# Altium PCB esp_sd_debug_adapter.PcbDoc
Units mm, origin at the board's own origin, x right, y up, seen from the top; angles counter-clockwise.
Board outline 11 x 27.5 mm, 2 copper layers (Top Layer, Bottom Layer), stack 0.773 mm thick; 3 components, 8 nets, 20 pads, 10 vias.
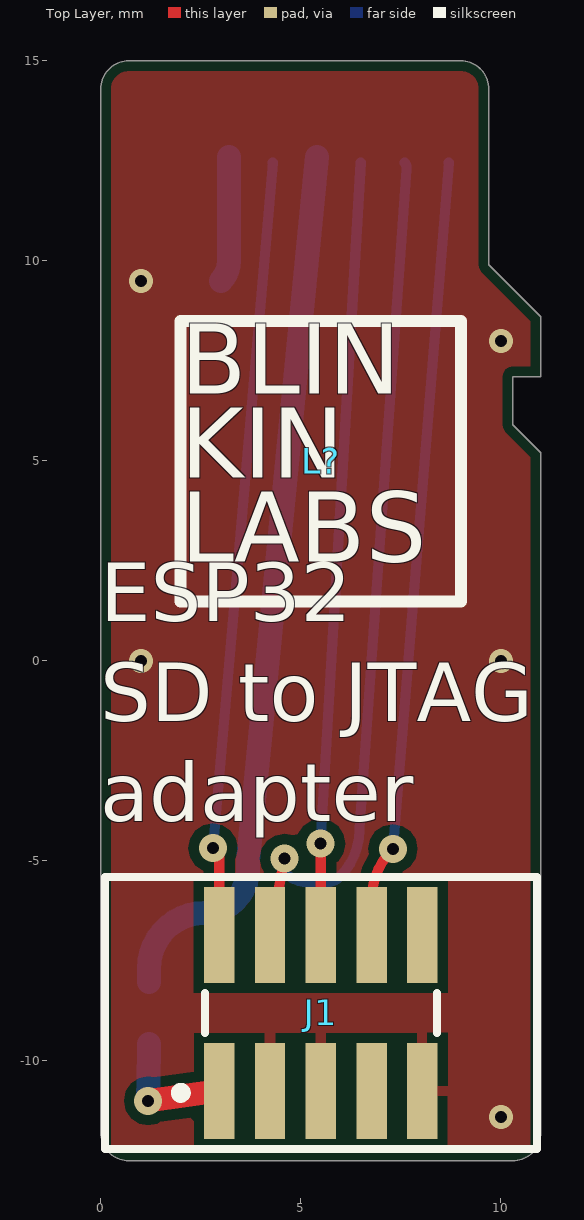
[diagram p0: Top Layer view]
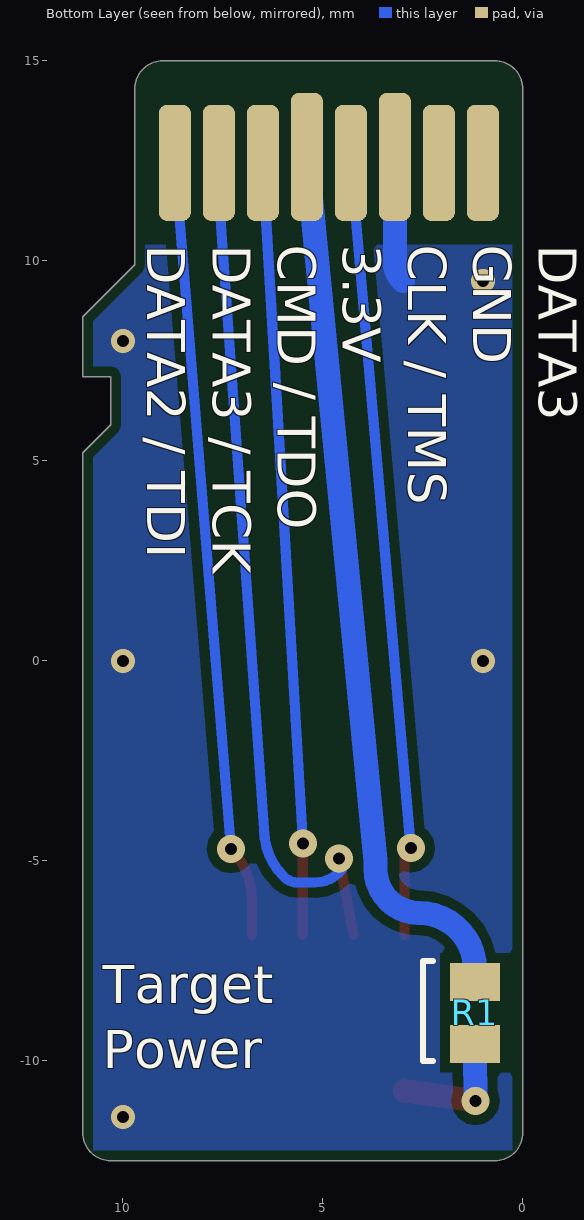
[diagram p1: Bottom Layer view, seen from below]

## Layer stack, top to bottom
Top Solder: solder mask 0.0127, Solder Resist, Dk 3.8
Top Layer: signal copper 0.0356
Dielectric 1: dielectric 0.702, FR-4, Dk 4.8
Bottom Layer: signal copper 0.0356
Bottom Solder: solder mask 0.0127, Solder Resist, Dk 3.8

## Board outline
0,-11.8 0,14.3 cw(c0.7,14.3) 0.7,15 9,15 cw(c9,14.3) 9.7,14.3 9.7,9.9 11,8.6 11,7.1 10.3,7.1 10.3,5.9 11,5.2 11,-11.8 cw(c10.3,-11.8) 10.3,-12.5 0.7,-12.5 cw(c0.7,-11.8)

## Design rules (kind name [scope] priority, off if disabled: settings)
BoardOutlineClearance [All] p1: gap=0.254 ignorepadtopadclearanceinfootprint=FALSE except(0: Arc-SplitContinuation Track-SplitContinuation SMDPad-SplitContinuation THPad-SplitContinuation Via-SplitContinuation Fill-SplitContinuation Poly-SplitContinuation Region-SplitContinuation Text-SplitContinuation)
Clearance [All] p1: gap=0.254 ignorepadtopadclearanceinfootprint=FALSE except(0: Arc-Hole Track-Hole SMDPad-Hole THPad-Hole Via-Hole Fill-Hole Poly-Hole Region-Hole Text-Hole)
PolygonConnect [All] p1: thpad.connectstyle=Relief thpad.reliefconductorwidth=0.254 thpad.reliefentries=4 thpad.polygonreliefangle="90 Angle" thpad.airgapwidth=0.254 smdpad.connectstyle=Relief smdpad.reliefconductorwidth=0.254 smdpad.reliefentries=4 smdpad.polygonreliefangle="90 Angle" smdpad.airgapwidth=0.254 via.connectstyle=Direct via.reliefconductorwidth=0.254 via.reliefentries=4 via.polygonreliefangle="90 Angle" via.airgapwidth=0.254
RoutingVias [All] p1: holewidth=0.711 width=1.27 viastyle="Through Hole" minholewidth=0.3 minwidth=0.7 maxholewidth=0.711 maxwidth=1.27
SolderMaskExpansion SolderMaskExpansion_vias [IsVia] p1: expansion=-999 istentingtop=FALSE
SolderMaskExpansion [All] p2: expansion=0.102 istentingtop=FALSE
Width [All] p1: maxlimit=0.6 minlimit=0.254 preferedwidth=0.254
30 further rules are at their usual default settings.

## Components (designator, comment, footprint, x,y, rotation, side; value= is the part's Value field where it differs from the comment)
J1 "JTAG" "1.27mm 2x5 SMD Header" 5.5,-8.8 r0 top
L? "BLINKINLABS_LOGO" BLINKINLABS_LOGO 5.5,5 r0 top
R1 "0.0" ERJ6G(0805)_L 1.2,-8.8 r270 bottom

## Footprints (in the part's own frame and the unit in brackets; to place one, negate y for a bottom-side part, rotate by r counter-clockwise, add the part's x,y. Pads: shape width x height; smd on the part's side, far side on the other; paste and mask are expansions set on the pad)
"1.27mm 2x5 SMD Header" [mm]
  rect 0.76x2.4 smd: 1(-2.54,-1.95) 2(-2.54,1.95) 3(-1.27,-1.95) 4(-1.27,1.95) 5(0,-1.95) 6(0,1.95) 7(1.27,-1.95) 8(1.27,1.95) 9(2.54,-1.95) 10(2.54,1.95)
  silkscreen extent -5.4,-3.4 5.4,3.4, body extent -3.15,-2.75 3.2,2.75, height 4.5
BLINKINLABS_LOGO [mm] "Square blinkinlabs logo"
  silkscreen extent -3.51,-3.51 3.5,3.5
ERJ6G(0805)_L [mm] "Chip Resistor, 2-Leads, Body 2.00x1.25mm, IPC High Density"
  rect 0.95x1.25 smd: 1(-0.775,0) 2(0.775,0)
  body extent -1.1,-0.67 1.1,0.67, height 0.7

## Part data
J1: library part "ARM Cortex JTAG", "Arm Cortex 10-pin JTAG connector", Manufacturer=Unknown/Generic, PartNumber=unknown/Generic
L?: "Square logo"
R1: library part ERJ-6GEY0R00V, "RES SMD 0.0 OHM JUMPER 1/8W 0805", Case/Package=0805, Digi-Key Part Number=P0.0ACT-ND, Manufacturer="Panasonic Electronic Components", Operating Temperature="-55°C ~ 155°C", Package / Case="0805 (2012 Metric)", Power (Watts)="0.125W, 1/8W", Temperature Coefficient=-, Tolerance=Jumper, Composition="Thick Film", Datasheets=http://industrial.panasonic.com/www-cgi/jvcr13pz.cgi?E+PZ+3+AOA0001+ERJ6GEY0R00V+7+WW, Features="Automotive AEC-Q200", Height - Seated (Max)="0.028\" (0.70mm)", Image=//media.digikey.com/Renders/Panasonic%20Renders/ERJ-0805%20Pkg.jpg, Number of Terminations=2, PartNumber=ERJ-6GEY0R00V, Series=ERJ, Size / Dimension="0.079\" L x 0.049\" W (2.00mm x 1.25mm)"

## Free pads (board coordinates)
  rrect50% 0.8x2.9 smd far side: P1(8.7,12.45) P2(7.6,12.45) P3(6.5,12.45) P5(4.3,12.45) P7(2.1,12.45) P8(1,12.45)
  rrect50% 0.8x3.2 smd far side: P4(5.4,12.6) P6(3.2,12.6)

## Via types
v1: diameter 0.6, hole 0.3, Top Layer to Bottom Layer, 5 vias
v2: diameter 0.7, hole 0.3, Top Layer to Bottom Layer, 5 vias

## Nets (pads, with @x,y where several pads share a name; then routed paths per layer and width w, separated by ;. In a path a pad name is that pad's centre, name@x,y a point inside that pad or via, vN(x,y) a via of type N, cw(c..) or ccw(c..) an arc to the next point about the centre after c; other vN are vias at no path point)
+3.3V: pad.P4 R1.1 | length 22.1
  Bottom Layer w0.6: R1.1 1.2,-7.7 cw(c2.6,-7.7) 2.6,-6.3 ccw(c2.6,-5.222) 3.623,-5.562 ccw(c2.6,-5.222) 3.678,-5.222 3.678,-4.998 pad.P4
CLK_TMS: J1.2 pad.P5 | length 19.4
  Top Layer w0.254: v2(2.801,-4.681) 2.811,-4.687 2.96,-4.836 J1.2
  Bottom Layer w0.254: v2(2.801,-4.681) pad.P5
CMD_TDO: J1.6 pad.P3 | length 19.3
  Top Layer w0.254: v2(5.496,-4.57) 5.498,-4.583 cw(c5.246,-4.615) 5.5,-4.615 J1.6
  Bottom Layer w0.254: v2(5.496,-4.57) pad.P3
DATA2_TDI: J1.8 pad.P1 | length 19.5
  Top Layer w0.254: J1.8 6.77,-5.98 cw(c8.58,-5.98) v2(7.3,-4.7)
  Bottom Layer w0.254: v2(7.3,-4.7) pad.P1
DATA3_TCK: J1.4 pad.P2 | length 21.9
  Top Layer w0.254: J1.4 v2(4.593,-4.938)
  Bottom Layer w0.254: v2(4.593,-4.938) 4.521,-5.01 4.521,-5.221 4.597,-5.297 4.599,-5.298 ccw(c5.2,-4.674) 5.2,-5.541 5.629,-5.541 ccw(c5.629,-5.046) 5.978,-5.396 ccw(c4.799,-4.217) 6.467,-4.225 cw(c6.721,-4.226) 6.467,-4.208 7.641,12.291 ccw(c7.388,12.31) 7.606,12.441 7.601,12.449 pad.P2
GND: J1.3 J1.5 J1.9 pad.P6 | length 3.2
  Bottom Layer w0.6: 3,9.5 ccw(c2.517,9.983) 3.2,9.983 pad.P6
  other v1: 10,-11.4 1,0 10,0 10,8 1,9.5
NetJ1_1: J1.1 R1.2 | length 3.2
  Top Layer w0.6: v2(1.184,-11) J1.1
  Bottom Layer w0.6: v2(1.184,-11) 1.2,-9.793 R1.2
RESET: J1.10
pads on no net: J1.7

## Polygon pours and split planes (outlines as drawn)
GND on Top Layer "GND_L01_P000" (solid, pour order 0): 0,-12.5 11,-12.5 11,5.2 10.3,5.9 10.3,7.1 11,7.1 11,8.6 9.7,9.9 9.7,14.3 9,15 0.7,15 0,14.3
GND on Bottom Layer "GND_L02_P001" (solid, pour order 1): 0,-12.5 11,-12.5 11,5.2 10.3,5.9 10.3,7.1 11,7.1 11,8.6 9.7,9.9 9.7,10.4 0,10.4

## Silkscreen, mask and mechanical layers (free items; w line width, h text height)
Top Overlay:
  text "ESP32 / SD to JTAG / adapter" at -0.018,-4.5 h2.5
Bottom Overlay:
  lines w0.15: 2.25,-10 2.5,-10 2.5,-7.5 2.25,-7.5
  text "DATA2 / DATA3 / GND / CLK / TMS / 3.3V / CMD / TDO / DATA3 / TCK / DATA2 / TDI" at 9.7,10.4 h1.63 r90
  text "Target / Power" at 10.5,-10.5 h1.63
Mechanical 1:
  lines w0.1: 0,-11.8 ccw(c0.7,-11.8) 0.7,-12.5 10.3,-12.5 ccw(c10.3,-11.8) 11,-11.8 11,0 11,5.2 10.3,5.9 10.3,7.1 11,7.1 11,8.6 9.7,9.9 9.7,14.3 ccw(c9,14.3) 9,15 0.7,15 ccw(c0.7,14.3) 0,14.3 0,0 0,-11.8
Dimensions:
  lines w0.2: -9.561,-32.65 -2.662,-32.65 12.9,-32.65 27.296,-32.65 38.193,-32.65 47.758,-32.65 ; -9.561,-30.65 -2.662,-30.65 12.9,-30.65 27.296,-30.65 38.193,-30.65 47.758,-30.65 ; -9.561,-28.65 -2.662,-28.65 12.9,-28.65 27.296,-28.65 38.193,-28.65 47.758,-28.65 ; -9.561,-26.65 -2.662,-26.65 12.9,-26.65 27.296,-26.65 38.193,-26.65 47.758,-26.65 ; -9.561,-24.65 -2.662,-24.65 12.9,-24.65 27.296,-24.65 38.193,-24.65 47.758,-24.65 ; -9.561,-22.65 -2.662,-22.65 12.9,-22.65 27.296,-22.65 38.193,-22.65 47.758,-22.65 ; -9.561,-20.65 47.758,-20.65 ; -2.662,-18.65 -2.662,-34.65 ; 0,0 11,0 ; 12.9,-18.65 12.9,-34.65 ; 27.296,-18.65 27.296,-34.65 ; 38.193,-18.65 38.193,-34.65 ; -2.662,-34.65 12.9,-34.65 ; -2.662,-34.65 -9.561,-34.65 -9.561,-18.65 47.758,-18.65 47.758,-34.65 38.193,-34.65 ; 12.9,-34.65 27.296,-34.65 ; 27.296,-34.65 38.193,-34.65
  text "Layer" at -8.361,-20.15 h1
  text "Name" at -1.462,-20.15 h1
  text "Material" at 14.1,-20.15 h1
  text "Thickness" at 28.496,-20.15 h1
  text "Constant" at 39.393,-20.15 h1
  text "Top Overlay" at -1.462,-22.15 h1
  text "Top Solder" at -1.462,-24.15 h1
  text "Solder Resist" at 14.1,-24.15 h1
  text "0.013mm" at 28.496,-24.15 h1
  text "3.8" at 39.393,-24.15 h1
  text "1" at -8.361,-26.15 h1
  text "Top Layer" at -1.462,-26.15 h1
  text "Copper" at 14.1,-26.15 h1
  text "0.036mm" at 28.496,-26.15 h1
  text "Dielectric 1" at -1.462,-28.15 h1
  text "FR-4" at 14.1,-28.15 h1
  text "0.702mm" at 28.496,-28.15 h1
  text "4.8" at 39.393,-28.15 h1
  text "2" at -8.361,-30.15 h1
  text "Bottom Layer" at -1.462,-30.15 h1
  text "Copper" at 14.1,-30.15 h1
  text "0.036mm" at 28.496,-30.15 h1
  text "Bottom Solder" at -1.462,-32.15 h1
  text "Solder Resist" at 14.1,-32.15 h1
  text "0.013mm" at 28.496,-32.15 h1
  text "3.8" at 39.393,-32.15 h1
  text "Bottom Overlay" at -1.462,-34.15 h1
  text "Total board thickness:" at -8.361,-36.15 h1
  text "0.799mm" at 28.496,-36.15 h1

## Dimensions
0.7,15 to 0.7,-12.5 on Dimensions
10.3,7.1 to 11,7.1 on Dimensions
10.3,5.9 to 11,7.1 on Dimensions
9.7,15 to 11,8.6 on Dimensions
11,7.1 to 9,15 on Dimensions
0,14.3 to 9.7,14.3 on Dimensions
0,0 to 0.7,15 on Dimensions
0,0 to 11,0 on Dimensions

## Text inside footprints (layer, text, board x,y; h text height)
L?: Top Overlay "BLIN" at 2,6.1 h3; Top Overlay "KIN" at 2,4 h3; Top Overlay "LABS" at 2,1.9 h3